# Altium PCB UF_Servo.PcbDoc (part 7 of 12)
Units mm, origin at the board's own origin, x right, y up, seen from the top; angles counter-clockwise.
Board outline 222.63 x 100.1 mm, 6 copper layers (L1, L2, L3, L4, L5, L6), stack 1.609 mm thick; 1138 components, 775 nets, 3720 pads, 1641 vias.
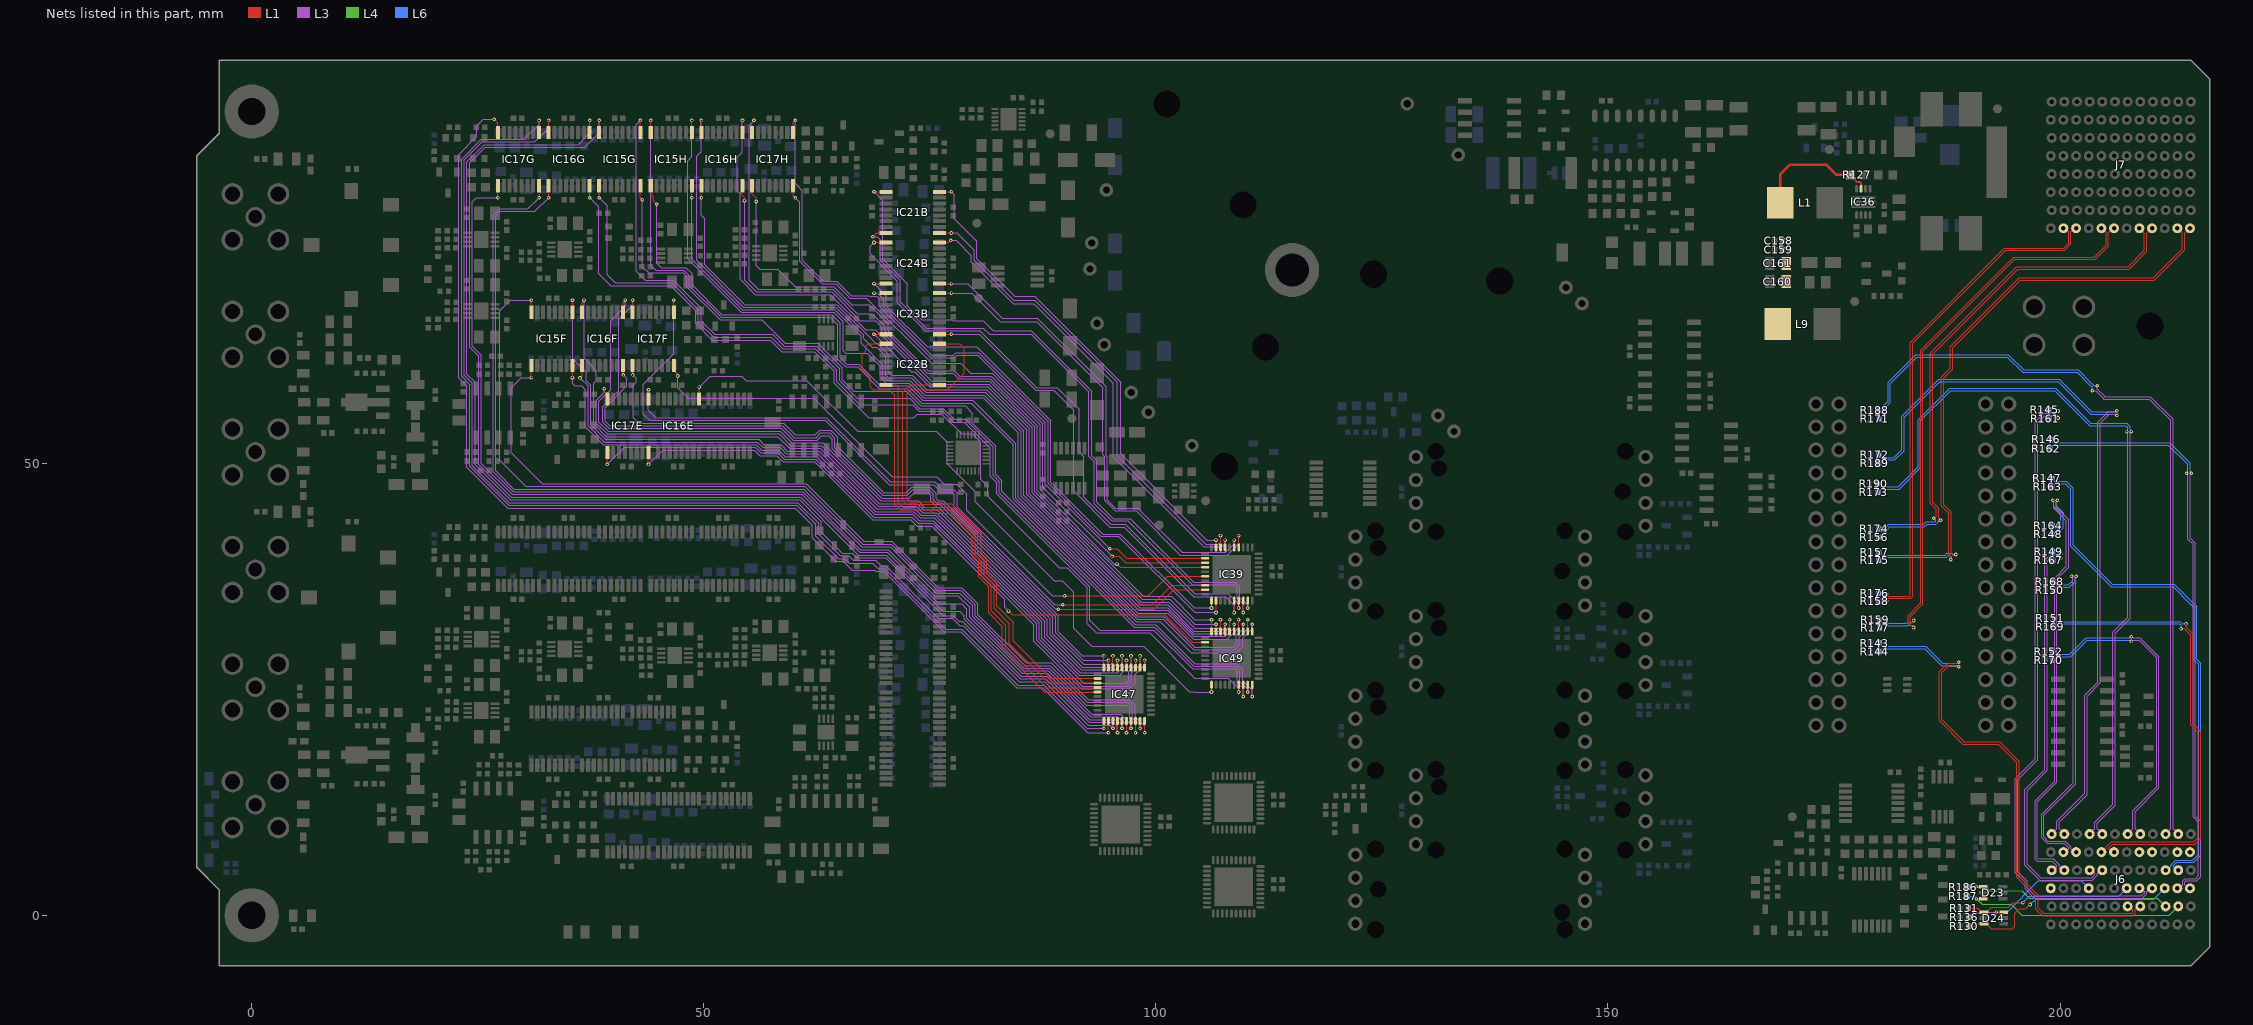
[diagram p8: the nets of this part, all layers, seen from the top]

## Via types
v1: diameter 0.4, hole 0.2, L1 to L6, tented both sides, 1545 vias
v2: diameter 0.4, hole 0.2, L1 to L6, 84 vias
v3: diameter 0.5, hole 0.25, L1 to L6, tented both sides, 12 vias

## Nets (pads, with @x,y where several pads share a name; then routed paths per layer and width w, separated by ;. In a path a pad name is that pad's centre, name@x,y a point inside that pad or via, vN(x,y) a via of type N, cw(c..) or ccw(c..) an arc to the next point about the centre after c; other vN are vias at no path point) (continued)
CAP0.CAP_SEL2.SEL0: (continued)
  L1 w0.1: IC17G.1@31.775,86.65 v1(31.775,87.975) ; v1(94.25,20.75) IC47.21@94.25,21.55
  L3 w0.1: v1(31.775,87.975) 31.775,87.575 30.1,85.9 25.4,85.9 23.2,83.7 23.2,59.651 24.1,58.751 24.1,49.7 28.4,45.4 60.3,45.4 62.4,43.3 62.4,42 64.9,39.5 65.6,39.5 66.1,39 68.7,39 69.3,38.4 70.024,38.4 76.724,31.7 78.5,31.7 84.7,25.5 87.6,25.5 92.35,20.75 v1(94.25,20.75)
CAP0.CAP_SEL2.SEL1: IC17G.16 IC47.27 | length 119.6
  L1 w0.1: v1(31.775,79.425) IC17G.16@31.775,80.75 ; v1(97.25,20.75) IC47.27@97.25,21.55
  L3 w0.1: v1(31.775,79.425) 30.55,78.2 27.4,78.2 26.7,77.5 26.7,49.088 28.9,46.888 60.912,46.888 67.3,40.5 70.4,40.5 75.5,35.4 78.1,35.4 79.4,34.1 79.4,33 85.3,27.1 88.1,27.1 92.9,22.3 96.1,22.3 97.25,21.15 v1(97.25,20.75)
CAP0.CAP_SEL2.SEL2: IC17G.9 IC47.26 | length 119.8
  L1 w0.1: v1(27.225,79.425) IC17G.9@27.225,80.75 ; v1(96.75,20.25) IC47.26@96.75,21.55
  L3 w0.1: v1(27.225,79.425) 24.825,79.425 24.4,79 24.4,63 25.4,62 25.4,50 28.8,46.6 60.824,46.6 67.224,40.2 70.3,40.2 76,34.5 78.5,34.5 79.1,33.9 79.1,32.9 85.2,26.8 88,26.8 92.8,22 95.8,22 96.75,21.05 v1(96.75,20.25)
CAP0.CAP_SEL2.SEL3: IC17G.8 IC47.22 | length 128
  L1 w0.1: v1(26.8,88.1) 27.225,87.675 IC17G.8@27.225,86.65 ; v1(94.75,20.25) IC47.22@94.75,21.55
  L3 w0.1: v1(26.8,88.1) 25.6,88.1 24.9,87.4 24.9,86.2 22.9,84.2 22.9,59.527 23.8,58.627 23.8,49.6 28.3,45.1 60.1,45.1 62,43.2 62,41.8 64.6,39.2 65.4,39.2 66.4,38.2 68.9,38.2 69,38.1 69.9,38.1 76.6,31.4 78.4,31.4 84.6,25.2 87.5,25.2 92.45,20.25 v1(94.75,20.25)
CAP1.CAP_SEL0.SEL0: IC15H.1 IC49.2 | length 102.2
  L1 w0.1: IC15H.1@44.125,80.75 44.125,79.875 44.4,79.6 44.4,79.1 v1(44.8,78.7) ; IC49.2@110.15,31.45 v1(110.15,32.75)
  L3 w0.1: v1(44.8,78.7) 44.8,72.2 45.3,71.7 48,71.7 48.7,71 48.7,69.8 52,66.5 64.124,66.5 65.1,65.524 65.1,61.7 65.8,61 67.124,61 69.524,58.6 72.624,58.6 74.224,57 79.724,57 84.5,52.224 84.5,46.2 97.912,32.788 100.788,32.788 104.176,29.4 108.7,29.4 109.2,29.9 109.2,30.8 110.15,31.75 v1(110.15,32.75)
CAP1.CAP_SEL0.SEL1: IC15H.16 IC49.1 | length 110.9
  L1 w0.1: IC15H.16@44.125,86.65 v1(44.125,87.975) ; IC49.1@110.65,31.45 v1(110.65,32.25)
  L3 w0.1: v1(44.125,87.975) 44.125,71.975 44.7,71.4 47.8,71.4 48.4,70.8 48.4,69.7 51.9,66.2 64,66.2 64.8,65.4 64.8,61.576 65.676,60.7 67,60.7 69.4,58.3 72.5,58.3 74.1,56.7 79.6,56.7 84.2,52.1 84.2,46.1 97.8,32.5 100.5,32.5 103.9,29.1 108.9,29.1 109.6,29.8 109.6,30.7 110.65,31.75 v1(110.65,32.25)
CAP1.CAP_SEL0.SEL2: IC15H.9 IC49.3 | length 105.5
  L1 w0.1: IC15H.9@48.675,86.65 v1(48.675,87.975) ; IC49.3@109.65,31.45 v1(109.65,32.25)
  L3 w0.1: v1(48.675,87.975) 48.675,83.975 48.2,83.5 48.2,72.7 54.149,66.751 64.349,66.751 65.4,65.7 65.4,62.5 65.7,62.2 68.1,62.2 69.5,60.8 69.5,59.6 70.2,58.9 72.7,58.9 74.3,57.3 80.9,57.3 84.8,53.4 84.8,46.3 98,33.1 100.9,33.1 104.3,29.7 108.6,29.7 108.9,30 108.9,31 109.65,31.75 v1(109.65,32.25)
CAP1.CAP_SEL0.SEL3: IC15H.8 IC49.4 | length 94.1
  L1 w0.1: v1(48.675,79.425) IC15H.8@48.675,80.75 ; IC49.4@109.15,31.45 v1(109.15,32.75)
  L3 w0.1: v1(48.675,79.425) 48.675,72.625 54.266,67.034 64.466,67.034 67.4,64.1 67.4,63.3 69.8,60.9 69.8,59.7 70.3,59.2 72.824,59.2 74.424,57.6 81.024,57.6 85.1,53.524 85.1,46.4 98.012,33.488 101.288,33.488 104.176,30.6 107.9,30.6 109.15,31.85 v1(109.15,32.75)
CAP1.CAP_SEL1.SEL0: IC16H.1 IC49.6 | length 91.6
  L1 w0.1: v1(49.725,79.425) IC16H.1@49.725,80.75 ; IC49.6@108.15,31.45 v1(108.15,32.75)
  L3 w0.1: v1(49.725,79.425) 49.725,77.475 50.1,77.1 50.1,72 54.5,67.6 64.7,67.6 69,63.3 69.2,63.3 70.4,62.1 70.4,60.2 70.8,59.8 73.073,59.8 74.673,58.2 81.273,58.2 85.7,53.773 85.7,46.6 98.212,34.088 101.288,34.088 104.176,31.2 107.4,31.2 108.15,31.95 v1(108.15,32.75)
CAP1.CAP_SEL1.SEL1: IC16H.16 IC49.5 | length 100.9
  L1 w0.1: IC16H.16@49.725,86.65 v1(49.725,87.975) ; IC49.5@108.65,31.45 v1(108.65,32.25)
  L3 w0.1: v1(49.725,87.975) 49.725,84.525 49.2,84 49.2,72.5 54.383,67.317 64.583,67.317 67.7,64.2 67.7,63.8 68.6,62.9 69.1,62.9 70.1,61.9 70.1,59.8 70.4,59.5 72.949,59.5 74.549,57.9 81.149,57.9 85.4,53.649 85.4,46.5 98.112,33.788 101.288,33.788 104.176,30.9 104.3,30.9 107.7,30.9 108.65,31.85 v1(108.65,32.25)
CAP1.CAP_SEL1.SEL2: IC16H.9 IC49.8 | length 94.7
  L1 w0.1: IC16H.9@54.275,86.65 v1(54.275,87.975) ; IC49.8@107.15,31.45 v1(107.15,32.75)
  L3 w0.1: v1(54.275,87.975) 54.275,84.475 53.7,83.9 53.7,80.2 54,79.9 54,70.4 55.7,68.7 64,68.7 67.9,64.8 69,64.8 69.4,64.4 69.5,64.4 75.1,58.8 81.5,58.8 86.3,54 86.3,46.8 98.4,34.7 101.4,34.7 104.3,31.8 106.9,31.8 107.15,32.05 v1(107.15,32.75)
CAP1.CAP_SEL1.SEL3: IC16H.8 IC49.9 | length 83.8
  L1 w0.1: IC16H.8@54.275,80.75 54.275,79.625 54.5,79.4 v1(54.5,79.1) ; IC49.9@106.65,31.45 v1(106.65,32.25)
  L3 w0.1: v1(54.5,79.1) 54.5,70.3 55.8,69 64.124,69 67.324,65.8 69,65.8 69.7,65.1 69.7,64.6 75.2,59.1 81.6,59.1 86.6,54.1 86.6,46.9 98.475,35.025 101.525,35.025 104.3,32.25 v1(106.65,32.25)
CAP1.CAP_SEL2.SEL0: IC17H.1 IC39.14 | length 77.2
  L1 w0.1: IC17H.1@55.325,80.75 55.325,79.875 55.8,79.4 v1(55.8,79) ; v1(95.7,38.9) 96.05,38.55 IC39.14@105.45,38.55
  L3 w0.1: v1(55.8,79) 55.8,71.9 56.2,71.5 58.2,71.5 60.1,69.6 64.373,69.6 66.373,67.6 68.3,67.6 70.4,65.5 70.4,64.7 74.8,60.3 77.7,60.3 78.3,59.7 81.8,59.7 87.183,54.317 87.183,47.117 95.4,38.9 v1(95.7,38.9)
CAP1.CAP_SEL2.SEL1: IC17H.16 IC49.10 | length 91.9
  L1 w0.1: IC17H.16@55.325,86.65 55.325,87.775 v1(55.55,88) ; IC49.10@106.15,31.45 v1(106.15,32.75)
  L3 w0.1: v1(55.55,88) 55,87.45 55,70.3 56,69.3 64.249,69.3 66.949,66.6 68.6,66.6 70,65.2 70,64.7 74.683,60.017 77.583,60.017 78.183,59.417 81.683,59.417 86.9,54.2 86.9,47 98.575,35.325 101.725,35.325 104.3,32.75 v1(106.15,32.75)
CAP1.CAP_SEL2.SEL2: IC17H.9 IC39.12 | length 80.2
  L1 w0.1: IC17H.9@59.875,86.65 59.875,87.775 v1(60.1,88) ; v1(94.9,40.6) 95.7,40.6 96.75,39.55 IC39.12@105.45,39.55
  L3 w0.1: v1(60.1,88) 60.1,81 60.9,80.2 60.9,72.5 63.2,70.2 64.7,70.2 66.3,68.6 68.3,68.6 68.4,68.5 69.1,68.5 69.4,68.2 69.4,67.4 75.1,61.7 77.7,61.7 78,62 80.3,62 87.783,54.517 87.783,47.717 v1(94.9,40.6)
CAP1.CAP_SEL2.SEL3: IC17H.8 IC39.13 | length 71.4
  L1 w0.1: IC17H.8@59.875,80.75 59.875,79.625 v1(60.1,79.4) ; v1(95.153,39.747) 95.953,39.747 96.65,39.05 IC39.13@105.45,39.05
  L3 w0.1: v1(60.1,79.4) 60.6,78.9 60.6,72.4 63.083,69.917 64.583,69.917 66.183,68.317 67.983,68.317 75.2,61.1 78.4,61.1 79.5,60 81.9,60 87.5,54.4 87.5,47.4 v1(95.153,39.747)
CAP2.CAP_SEL0.SEL0: IC22B.1 IC47.13 | length 51.4
  L1 w0.1: IC22B.1@76.05,58.725 72.825,58.725 72,57.9 72,45.893 72.393,45.5 75.5,45.5 75.8,45.2 77.4,45.2 80.3,42.3 80.3,40.1 81,39.4 81,37.7 82.1,36.6 82.1,34.028 83.8,32.328 83.8,30.093 88.143,25.75 IC47.13@93.55,25.75
CAP2.CAP_SEL0.SEL1: IC22B.16 IC47.14 | length 50.1
  L1 w0.1: IC22B.16@70.15,58.725 71.275,58.725 71.5,58.5 71.5,45.686 71.986,45.2 75.2,45.2 75.5,44.9 77.3,44.9 80,42.2 80,39.9 80.7,39.2 80.7,37.6 81.8,36.5 81.8,33.763 83.4,32.163 83.4,29.786 87.936,25.25 IC47.14@93.55,25.25
CAP2.CAP_SEL0.SEL2: IC22B.9 IC47.15 | length 59
  L1 w0.1: IC22B.9@70.15,63.275 68.175,63.275 67.9,63 67.9,62.5 67.5,62.1 67.5,60.4 68.4,59.5 68.4,58.5 68.7,58.2 70.5,58.2 71.1,57.6 71.1,45.52 71.72,44.9 75,44.9 75.4,44.5 77.2,44.5 79.7,42 79.7,39.7 80.4,39 80.4,37.5 81.5,36.4 81.5,33.497 83,31.997 83,29.479 87.729,24.75 IC47.15@93.55,24.75
CAP2.CAP_SEL0.SEL3: IC22B.8 IC47.12 | length 58.9
  L1 w0.1: IC22B.8@76.05,63.275 78.325,63.275 78.8,62.8 78.8,60 77,58.2 72.9,58.2 72.5,57.8 72.5,46.1 72.8,45.8 75.7,45.8 75.9,45.6 77.4,45.6 80.7,42.3 80.7,40.1 81.3,39.5 81.3,37.9 82.4,36.8 82.4,34.294 84.2,32.494 84.2,30.4 88.35,26.25 IC47.12@93.55,26.25
CAP2.CAP_SEL1.SEL0: IC23B.1 IC39.26 | length 52.3
  L1 w0.1: IC23B.1@76.05,64.325 v1(77.375,64.325) ; v1(108.65,33.55) IC39.26@108.65,34.85
  L3 w0.1: v1(77.375,64.325) 80.475,64.325 86.683,58.117 88.678,58.117 90.9,55.895 90.9,47 94.9,43 96.476,43 104.176,35.3 107.7,35.3 108.65,34.35 v1(108.65,33.55)
CAP2.CAP_SEL1.SEL1: IC23B.16 IC49.7 | length 59.3
  L1 w0.1: v1(68.825,64.325) IC23B.16@70.15,64.325 ; IC49.7@107.65,31.45 v1(107.65,32.25)
  L3 w0.1: v1(68.825,64.325) 72.95,60.2 73.3,60.2 75,58.5 81.4,58.5 86,53.9 86,46.7 98.312,34.388 101.288,34.388 104.176,31.5 107.2,31.5 107.65,31.95 v1(107.65,32.25)
CAP2.CAP_SEL1.SEL2: IC23B.9 IC39.22 | length 59.8
  L1 w0.1: v1(68.825,68.875) IC23B.9@70.15,68.875 ; v1(106.65,33.55) IC39.22@106.65,34.85
  L3 w0.1: v1(68.825,68.875) 69.225,68.875 69.9,68.2 69.9,67.3 75.2,62 77.6,62 77.9,62.3 80.4,62.3 88.066,54.634 88.066,47.834 93.9,42 95.85,42 104.3,33.55 v1(106.65,33.55)
CAP2.CAP_SEL1.SEL3: IC23B.8 IC39.4 | length 55
  L1 w0.1: IC23B.8@76.05,68.875 v1(77.375,68.875) ; IC39.4@109.15,40.75 v1(109.15,42.05)
  L3 w0.1: v1(77.375,68.875) 79.625,68.875 82.8,65.7 86.8,65.7 94.1,58.4 94.1,51.017 94.331,50.786 94.331,45.969 95.5,44.8 97.8,44.8 102.7,39.9 107.9,39.9 109.15,41.15 v1(109.15,42.05)
CAP2.CAP_SEL2.SEL0: IC24B.1 IC39.5 | length 53.8
  L1 w0.1: IC24B.1@76.05,69.925 v1(77.375,69.925) ; IC39.5@108.65,40.75 v1(108.65,41.55)
  L3 w0.1: v1(77.375,69.925) 79.175,69.925 83,66.1 86.9,66.1 94.5,58.5 94.5,50.9 94.614,50.786 94.614,45.986 95.5,45.1 98.006,45.1 102.906,40.2 104.3,40.2 107.7,40.2 108.65,41.15 v1(108.65,41.55)
CAP2.CAP_SEL2.SEL1: IC24B.16 IC39.21 | length 59
  L1 w0.1: v1(68.825,69.925) IC24B.16@70.15,69.925 ; v1(106.15,34.05) IC39.21@106.15,34.85
  L3 w0.1: v1(68.825,69.925) 70.2,68.55 70.2,67.4 74.683,62.917 80.183,62.917 88.349,54.751 88.349,47.951 94.1,42.2 96.076,42.2 104.226,34.05 v1(106.15,34.05)
CAP2.CAP_SEL2.SEL2: IC24B.9 IC39.27 | length 67.6
  L1 w0.1: v1(68.825,74.475) IC24B.9@70.15,74.475 ; v1(109.15,34.05) IC39.27@109.15,34.85
  L3 w0.1: v1(68.825,74.475) 68.4,74.05 68.4,73.2 71.4,70.2 71.4,67.8 74.5,64.7 80.5,64.7 86.8,58.4 89.1,58.4 91.5,56 91.5,51.3 92,50.8 92,46.3 95,43.3 96.6,43.3 104.3,35.6 108,35.6 109.15,34.45 v1(109.15,34.05)
CAP2.CAP_SEL2.SEL3: IC24B.8 IC39.7 | length 52.2
  L1 w0.1: IC24B.8@76.05,74.475 77.075,74.475 v1(77.3,74.7) ; IC39.7@107.65,40.75 v1(107.65,41.55)
  L3 w0.1: v1(77.3,74.7) 77.9,74.7 79.6,73 79.6,72.3 84.2,67.7 86.5,67.7 95.3,58.9 95.3,50.8 105.3,40.8 107.2,40.8 107.65,41.25 v1(107.65,41.55)
CAP2.CAP_SEL3.SEL0: IC21B.1 IC39.8 | length 52.9
  L1 w0.1: IC21B.1@76.05,75.525 v1(77.375,75.525) ; IC39.8@107.15,40.75 v1(107.15,42.05)
  L3 w0.1: v1(77.375,75.525) 77.975,75.525 79.9,73.6 79.9,72.5 84.3,68.1 86.6,68.1 95.7,59 95.7,50.9 105.5,41.1 106.9,41.1 107.15,41.35 v1(107.15,42.05)
CAP2.CAP_SEL3.SEL1: IC21B.16 IC39.28 | length 71.9
  L1 w0.1: v1(68.7,75.1) 69.125,75.525 IC21B.16@70.15,75.525 ; v1(109.65,33.55) IC39.28@109.65,34.85
  L3 w0.1: v1(68.7,75.1) 69.2,75.1 69.5,74.8 69.5,72.5 71.7,70.3 71.7,67.9 74.617,64.983 80.917,64.983 81.6,64.3 86.2,64.3 92.55,57.95 92.55,50.85 93.2,50.2 93.2,45.6 95.1,43.7 96.9,43.7 104,36.6 108.7,36.6 109,36.3 109,35.1 109.65,34.45 v1(109.65,33.55)
CAP2.CAP_SEL3.SEL2: IC21B.9 IC39.29 | length 75.5
  L1 w0.1: v1(68.825,80.075) IC21B.9@70.15,80.075 ; v1(110.15,34.05) IC39.29@110.15,34.85
  L3 w0.1: v1(68.825,80.075) 69.8,79.1 69.8,72.6 72.5,69.9 72.5,67.5 74.1,65.9 77.5,65.9 77.6,65.8 80.9,65.8 82,64.7 86.2,64.7 92.9,58 92.9,50.9 93.483,50.317 93.483,45.717 95.3,43.9 97.176,43.9 104.176,36.9 108.8,36.9 109.3,36.4 109.3,35.2 110.15,34.35 v1(110.15,34.05)
CAP2.CAP_SEL3.SEL3: IC21B.8 IC39.9 | length 54.7
  L1 w0.1: IC21B.8@76.05,80.075 v1(77.375,80.075) ; IC39.9@106.65,40.75 v1(106.65,41.55)
  L3 w0.1: v1(77.375,80.075) 77.7,79.75 77.7,77.1 80.2,74.6 80.2,72.7 84.4,68.5 86.6,68.5 96.1,59 96.1,51.1 105.65,41.55 v1(106.65,41.55)
CAP3.CAP_SEL0.SEL0: IC17F.1 IC47.10 | length 73.2
  L1 w0.1: v1(42.125,59.825) IC17F.1@42.125,60.85 ; IC47.10@94.25,27.45 v1(94.25,28.75)
  L3 w0.1: v1(42.125,59.825) 42.5,59.45 42.5,59 42.2,58.7 42.2,55.1 42.8,54.5 58.821,54.5 60.121,53.2 62.3,53.2 62.8,53.7 64.049,53.7 64.8,52.949 64.8,51.9 69.9,46.8 72.4,46.8 73,47.4 75,47.4 75.7,46.7 75.7,46.1 75.9,45.9 76.5,45.9 89.2,33.2 89.2,31.4 91.85,28.75 v1(94.25,28.75)
CAP3.CAP_SEL0.SEL1: IC17F.16 IC47.8 | length 88.8
  L1 w0.1: IC17F.16@42.125,66.75 v1(42.125,68.075) ; IC47.8@95.25,27.45 v1(95.25,28.75)
  L3 w0.1: v1(42.125,68.075) 42.125,67.525 40.6,66 40.6,58.1 38.8,56.3 38.8,54.6 39.5,53.9 58.573,53.9 59.873,52.6 62.549,52.6 63.049,53.1 63.8,53.1 64.2,52.7 64.2,51.651 69.651,46.2 72.649,46.2 73.249,46.8 74.8,46.8 75.1,46.5 75.1,45.9 75.5,45.5 76.1,45.5 88.6,33 88.6,31.2 92,27.8 95,27.8 95.25,28.05 v1(95.25,28.75)
CAP3.CAP_SEL0.SEL2: IC17F.9 IC39.19 | length 88.2
  L1 w0.1: IC17F.9@46.675,66.75 v1(46.675,68.075) ; v1(89.2,33.9) 99.8,33.9 101.95,36.05 IC39.19@105.45,36.05
  L3 w0.1: v1(46.675,68.075) 46.675,62.175 43.3,58.8 43.3,55.5 44,54.8 63.4,54.8 70.514,47.686 75.414,47.686 76.266,46.834 77.466,46.834 77.7,46.6 77.7,45.1 88.9,33.9 v1(89.2,33.9)
CAP3.CAP_SEL0.SEL3: IC17F.8 IC39.16 | length 72.4
  L1 w0.1: IC17F.8@46.675,60.85 46.675,60.35 47.065,59.96 47.065,59.735 v1(47.1,59.7) ; v1(89.9,35.4) 99.179,35.4 101.329,37.55 IC39.16@105.45,37.55
  L3 w0.1: v1(47.1,59.7) 47.1,58.4 48.25,57.25 62.15,57.25 70.866,48.534 75.766,48.534 76.583,47.717 77.983,47.717 79.1,46.6 79.1,44.851 88.551,35.4 v1(89.9,35.4)
CAP3.CAP_SEL1.SEL0: IC16F.1 IC47.3 | length 83.3
  L1 w0.1: v1(36.3,59.5) 36.525,59.725 IC16F.1@36.525,60.85 ; IC47.3@97.75,27.45 v1(97.75,28.25)
  L3 w0.1: v1(36.3,59.5) 37.2,58.6 37.2,54.2 39,52.4 55.924,52.4 56.524,51.8 58.424,51.8 59.124,51.1 62.624,51.1 69.024,44.7 73.224,44.7 73.924,44 75.5,44 87.1,32.4 87.1,30.6 92,25.7 96.7,25.7 97,26 97,27 97.75,27.75 v1(97.75,28.25)
CAP3.CAP_SEL1.SEL1: IC16F.16 IC47.5 | length 88.8
  L1 w0.1: IC16F.16@36.525,66.75 36.525,67.875 v1(36.75,68.1) ; IC47.5@96.75,27.45 v1(96.75,28.25)
  L3 w0.1: v1(36.75,68.1) 36.75,61.65 38.1,60.3 38.1,59.2 37.8,58.9 37.8,54.4 39.2,53 58.2,53 59.5,51.7 62.9,51.7 69.3,45.3 73.5,45.3 74.2,44.6 75.7,44.6 87.7,32.6 87.7,30.827 91.627,26.9 95.8,26.9 96.75,27.85 v1(96.75,28.25)
CAP3.CAP_SEL1.SEL2: IC16F.9 IC47.7 | length 87
  L1 w0.1: IC16F.9@41.075,66.75 41.075,67.875 v1(41.3,68.1) ; IC47.7@95.75,27.45 v1(95.75,28.25)
  L3 w0.1: v1(41.3,68.1) 41.3,67.4 39.7,65.8 39.7,58.2 38.4,56.9 38.4,54.6 39.4,53.6 58.449,53.6 59.749,52.3 63.149,52.3 69.549,45.9 73.7,45.9 74.4,45.2 75.949,45.2 88.3,32.849 88.3,31.076 91.876,27.5 95.3,27.5 95.75,27.95 v1(95.75,28.25)
CAP3.CAP_SEL1.SEL3: IC16F.8 IC47.9 | length 77.7
  L1 w0.1: v1(41.075,59.825) IC16F.8@41.075,60.85 ; IC47.9@94.75,27.45 v1(94.75,28.25)
  L3 w0.1: v1(41.075,59.825) 41.5,59.4 41.5,58.6 39.1,56.2 39.1,54.7 39.6,54.2 58.697,54.2 59.997,52.9 62.424,52.9 62.924,53.4 63.924,53.4 64.5,52.824 64.5,51.776 69.776,46.5 72.524,46.5 73.124,47.1 74.9,47.1 75.4,46.6 75.4,46 75.7,45.7 76.3,45.7 88.917,33.083 88.917,31.283 91.95,28.25 v1(94.75,28.25)
CAP3.CAP_SEL2.SEL0: IC15F.1 IC47.30 | length 97.2
  L1 w0.1: v1(30.925,59.525) IC15F.1@30.925,60.85 ; v1(98.75,20.25) IC47.30@98.75,21.55
  L3 w0.1: v1(30.925,59.525) 29.825,59.525 28.7,58.4 28.7,51.2 32.1,47.8 61.3,47.8 67.7,41.4 70.8,41.4 75.934,36.266 78.534,36.266 80.3,34.5 80.3,33.3 85.634,27.966 88.434,27.966 92.5,23.9 97,23.9 97.7,23.2 97.7,22 98.75,20.95 v1(98.75,20.25)
CAP3.CAP_SEL2.SEL1: IC15F.16 IC47.29 | length 107.3
  L1 w0.1: IC15F.16@30.925,66.75 v1(30.925,68.075) ; v1(98.25,20.75) IC47.29@98.25,21.55
  L3 w0.1: v1(30.925,68.075) 28.575,68.075 27.4,66.9 27.4,50.4 30.3,47.5 61.166,47.5 67.566,41.1 70.7,41.1 75.817,35.983 78.417,35.983 80.017,34.383 80.017,33.183 85.517,27.683 88.317,27.683 92.4,23.6 96.9,23.6 97.4,23.1 97.4,21.9 98.25,21.05 v1(98.25,20.75)
CAP3.CAP_SEL2.SEL2: IC15F.9 IC47.4 | length 90.9
  L1 w0.1: IC15F.9@35.475,66.75 v1(35.475,68.075) ; IC47.4@97.25,27.45 v1(97.25,28.75)
  L3 w0.1: v1(35.475,68.075) 35.475,61.625 37,60.1 37,59.2 37.5,58.7 37.5,54.3 39.1,52.7 56.049,52.7 56.649,52.1 58.549,52.1 59.249,51.4 62.749,51.4 69.149,45 73.349,45 74.049,44.3 75.6,44.3 87.4,32.5 87.4,30.703 91.503,26.6 96,26.6 97.25,27.85 v1(97.25,28.75)
CAP3.CAP_SEL2.SEL3: IC15F.8 IC47.2 | length 85.9
  L1 w0.1: v1(35.475,59.525) IC15F.8@35.475,60.85 ; IC47.2@98.25,27.45 v1(98.25,28.75)
  L3 w0.1: v1(35.475,59.525) 35.475,58.825 35.7,58.6 36.5,58.6 36.9,58.2 36.9,54.1 38.9,52.1 55.8,52.1 56.4,51.5 58.3,51.5 59,50.8 62.5,50.8 68.9,44.4 73.1,44.4 73.8,43.7 75.4,43.7 86.8,32.3 86.8,30.476 91.876,25.4 96.8,25.4 97.3,25.9 97.3,26.8 98.25,27.75 v1(98.25,28.75)
CAP4.CAP_SEL0.SEL0: IC17E.1 IC39.18 | length 75.6
  L1 w0.1: IC17E.1@43.875,57.15 v1(43.875,58.175) ; v1(89.7,34.4) 99.593,34.4 101.743,36.55 IC39.18@105.45,36.55
  L3 w0.1: v1(43.875,58.175) 43.875,55.925 44.7,55.1 63.524,55.1 70.638,47.986 75.538,47.986 76.39,47.134 77.666,47.134 78,46.8 78,45.2 79.5,43.7 88.8,34.4 v1(89.7,34.4)
CAP4.CAP_SEL0.SEL1: IC17E.16 IC49.12 | length 72.9
  L1 w0.1: v1(43.875,49.925) IC17E.16@43.875,51.25 ; v1(83.7,33.7) 84.1,33.3 101,33.3 104.05,30.25 IC49.12@105.45,30.25
  L3 w0.1: v1(43.875,49.925) 45.45,51.5 55.573,51.5 56.173,50.9 58.073,50.9 58.773,50.2 62.273,50.2 68.673,43.8 72.9,43.8 73.6,43.1 75.2,43.1 83.3,35 83.3,34.1 v1(83.7,33.7)
CAP4.CAP_SEL0.SEL2: IC17E.9 IC47.1 | length 76.6
  L1 w0.1: v1(39.325,49.925) IC17E.9@39.325,51.25 ; IC47.1@98.75,27.45 v1(98.75,28.25)
  L3 w0.1: v1(39.325,49.925) 41.2,51.8 55.697,51.8 56.297,51.2 58.197,51.2 58.897,50.5 62.397,50.5 68.799,44.099 73.001,44.099 73.7,43.4 75.3,43.4 86.5,32.2 86.5,30.351 91.751,25.1 97,25.1 97.7,25.8 97.7,26.7 98.75,27.75 v1(98.75,28.25)
CAP4.CAP_SEL0.SEL3: IC17E.8 IC47.6 | length 78.4
  L1 w0.1: v1(39,58.3) 39,57.975 39.325,57.65 IC17E.8@39.325,57.15 ; IC47.6@96.25,27.45 v1(96.25,28.75)
  L3 w0.1: v1(39,58.3) 39,57.9 38.1,57 38.1,54.5 39.3,53.3 58.324,53.3 59.624,52 63.024,52 69.424,45.6 73.624,45.6 74.324,44.9 75.824,44.9 88,32.724 88,30.951 91.751,27.2 95.5,27.2 96.25,27.95 v1(96.25,28.75)
CAP4.CAP_SEL1.SEL0: IC16E.1 IC49.21 | length 78.2
  L1 w0.1: IC16E.1@49.475,57.15 v1(49.475,58.475) ; v1(106.15,24.75) IC49.21@106.15,25.55
  L3 w0.1: v1(49.475,58.475) 50.7,59.7 54.2,59.7 54.7,59.2 61.4,59.2 67,53.6 75.7,53.6 76.9,52.4 76.9,50 80,46.9 80,45.8 88.75,37.05 89.65,37.05 90.9,35.8 90.9,31.8 92.9,29.8 98.679,29.8 103.679,24.8 104.25,24.8 104.3,24.75 v1(106.15,24.75)